# Altium PCB Leningrad_orig.PcbDoc (part 3 of 3)
Units mil, origin at the board's own origin, x right, y up, seen from the top; angles counter-clockwise.
Board outline 8070.87 x 4724.41 mil, 2 copper layers (Top Layer, Bottom Layer); 124 components, 165 nets, 1259 pads, 367 vias.
Unrouted connection lines stored in the file: 15.
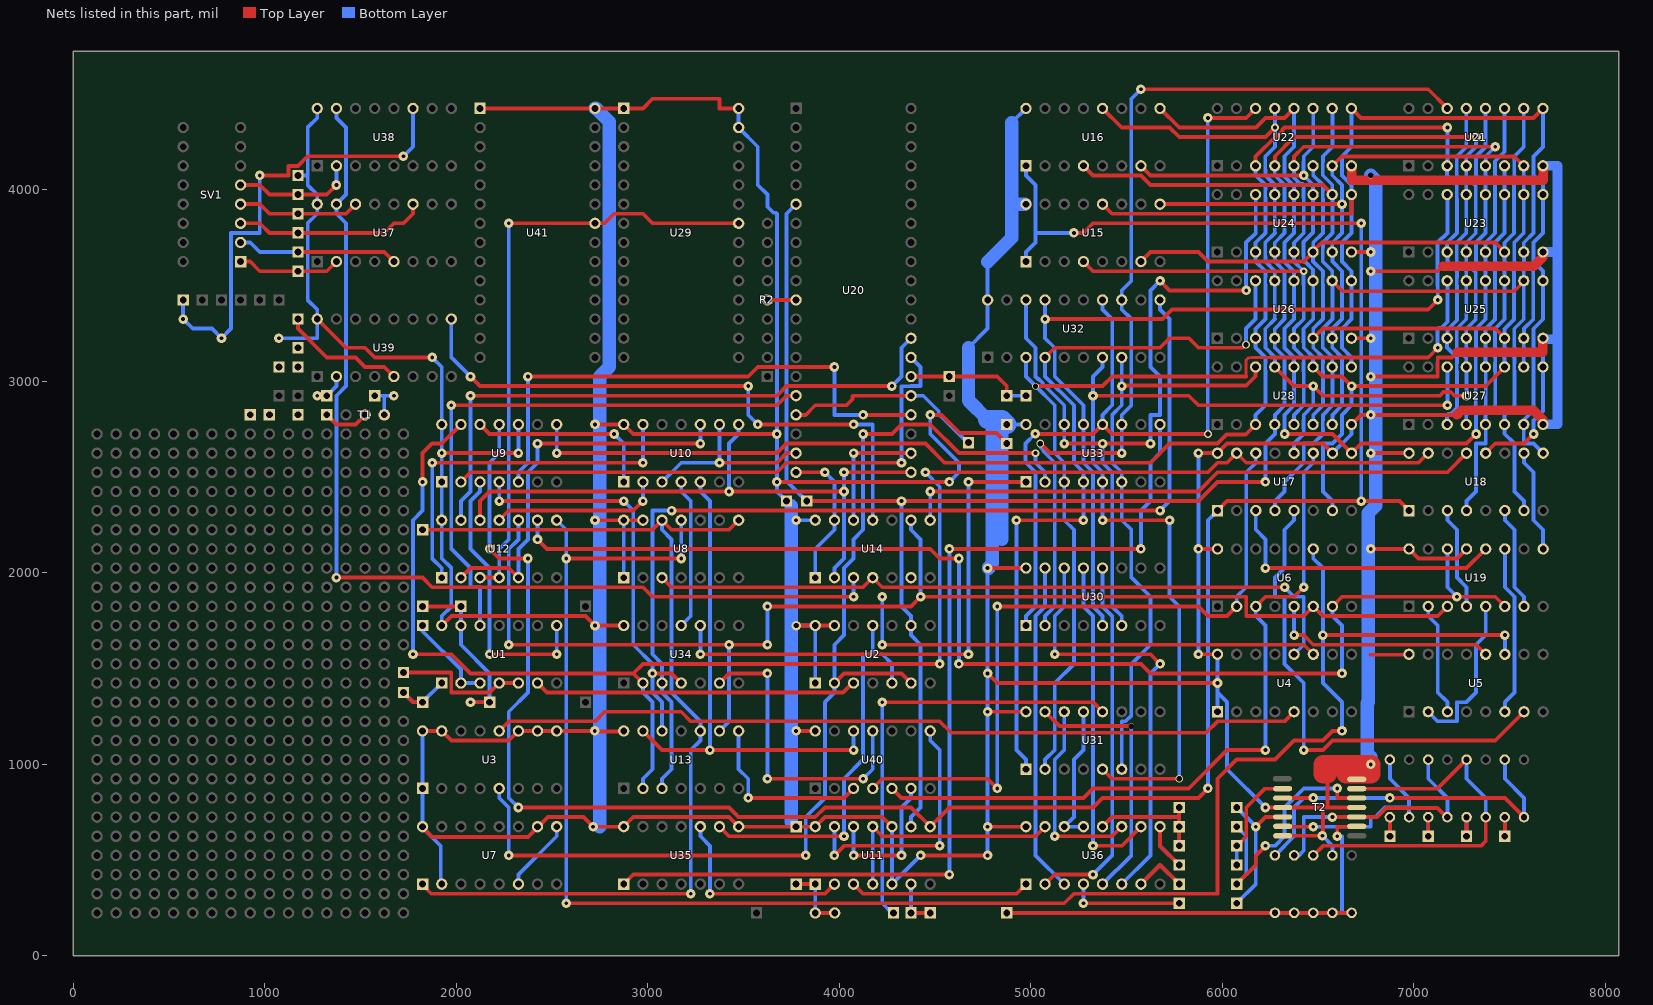
[diagram p2: the nets of this part, all layers, seen from the top]

## Via types
v1: diameter 50, hole 20, Top Layer to Bottom Layer, 354 vias
v2: diameter 40, hole 28, Top Layer to Bottom Layer, 6 vias
v3: diameter 40, hole 20, Top Layer to Bottom Layer, 3 vias
v4: diameter 30, hole 28, Top Layer to Bottom Layer, 2 vias
v5: diameter 50, hole 28, Top Layer to Bottom Layer, 1 vias
v6: diameter 35, hole 28, Top Layer to Bottom Layer, 1 vias

## Nets (pads, with @x,y where several pads share a name; then routed paths per layer and width w, separated by ;. In a path a pad name is that pad's centre, name@x,y a point inside that pad or via, vN(x,y) a via of type N, cw(c..) or ccw(c..) an arc to the next point about the centre after c; other vN are vias at no path point) (continued)
H\1\: U9.13 U13.2 U17.15 U18.15 U34.2 | length 8546
  Top Layer w20: v1(1775,1575) 1975,1575 2075,1475 2925,1475 ; v1(1825,2475) 1825,2625 1875,2675 1925,2675 U9.13@2025,2775 ; U34.2@2975,1425 2925,1475 ; v1(4450,2525) 5925,2525 5975,2575 6025,2575 U17.15@6075,2625 6125,2575 7025,2575 U18.15@7075,2625 ; v1(4525,1525) 2975,1525 2925,1475
  Bottom Layer w20: v1(1775,1575) 1775,2275 1825,2325 v1(1825,2475) ; U13.2@2975,875 2975,925 3025,975 3025,1325 2975,1375 U34.2@2975,1425 ; v1(4450,2525) 4525,2450 v1(4525,1525)
I\N\T\: U1.12 U20.16 | length 3062.1
  Top Layer w20: v1(1975,2875) 3675,2875 3725,2925 U20.16@3775,2925
  Bottom Layer w20: v1(1975,2875) 1975,2125 2075,2025 2075,1925 2125,1925 U1.12@2125,1725
I\O\R\D\: U14.3 U37.15 U38.15 | length 5374.3
  Top Layer w20: v1(1375,1975) 1825,1975 1875,1925 2975,1925 3025,1875 v1(4075,1875)
  Bottom Layer w20: v1(1375,1975) 1375,2925 1425,2975 1425,3825 1375,3875 U37.15@1375,3925 1425,3975 1425,4325 1375,4375 U38.15@1375,4425 ; v1(4075,1875) U14.3@4075,1975
I\O\R\Q\: U14.1 U14.13 U20.20 | length 762.1
  Top Layer w20: U20.20@3775,2525 v1(3925,2525)
  Bottom Layer w20: U14.1@3875,1975 3875,2125 3975,2225 U14.13@3975,2275 3975,2475 v1(3925,2525)
I\O\W\R\: U14.11 U39.9 | length 3132.8
  Top Layer w20: v1(2075,3025) 2125,2975 v1(3525,2975) ; v1(3575,2775) v1(4075,2775)
  Bottom Layer w20: U39.9@1975,3325 1975,3125 v1(2075,3025) ; v1(3525,2975) 3525,2825 v1(3575,2775) ; v1(4075,2775) 4175,2775 U14.11@4175,2275
INFV: U11.2 U35.10 | length 1041.4
  Top Layer w20: v1(3325,325) 3925,325 U11.2@3975,375
  Bottom Layer w20: U35.10@3275,675 3275,625 3325,575 v1(3325,325)
KL0: R23.1 SV1.1 U37.2 | length 541.4
  Top Layer w20: SV1.1@875,3625 925,3625 975,3575 R23.1@1175,3575 1325,3575 U37.2@1375,3625
KL1: RKL1.1 SV1.2 U37.5 | length 841.4
  Top Layer w20: RKL1.1@1175,3675 1625,3675 U37.5@1675,3625
  Bottom Layer w20: SV1.2@875,3725 925,3725 975,3675 RKL1.1@1175,3675
KL2: RKL2.1 SV1.3 U37.11 | length 1012.1
  Top Layer w20: SV1.3@875,3825 975,3825 1025,3775 RKL2.1@1175,3775 1625,3775 1675,3825 1725,3825 1775,3875 U37.11@1775,3925
KL3: RKL3.1 SV1.4 U37.14 | length 641.4
  Top Layer w20: SV1.4@875,3925 975,3925 1025,3875 RKL3.1@1175,3875 1425,3875 U37.14@1475,3925
KL4: RKL4.1 SV1.5 U38.2 | length 641.4
  Top Layer w20: SV1.5@875,4025 975,4025 1025,3975 RKL4.1@1175,3975 1325,3975 v1(1375,4025)
  Bottom Layer w20: v1(1375,4025) U38.2@1375,4125
M\1\: U9.2 U20.27 | length 3011
  Top Layer w20: U9.2@2025,2475 2075,2525 3675,2525 3725,2575 v1(4325,2575)
  Bottom Layer w20: v1(4325,2575) 4325,2925 4325.47,2925.47 4325.47,2974.53 4374.53,2974.53 4375.47,2975.47 4424.53,2975.47 4424.53,3024.53 4425,3025 4425,3075 U20.27@4375,3125
M\R\E\Q\: U10.3 U10.9 U20.19 | length 962.1
  Top Layer w20: v1(3375,2575) 3675,2575 3725,2625 U20.19@3775,2625
  Bottom Layer w20: U10.3@3075,2475 3175,2575 v1(3375,2575) U10.9@3375,2775
MA0: U15.4 U18.4 U21.5 U22.5 U23.5 U24.5 U25.5 U26.5 U27.5 U28.5 | length 5896.4
  Top Layer w20: U15.4@5275,3625 5325,3575 v3(6425,3575) ; U22.5@6373.81,4125 6373.81,4173.81 6425,4225 v1(7425,4225)
  Bottom Layer w20: U28.5@6373.81,2775 6375,2776.19 6375,2825 6425,2875 6425,3053.05 6424.28,3053.77 6424.28,3095.52 6425,3096.23 6425,3125 6375,3175 6375,3223.81 U26.5@6373.81,3225 6375,3226.19 6375,3275 6425,3325 6425,3503.05 6424.28,3503.77 6424.28,3574.28 v3(6425,3575) 6373.81,3626.19 U24.5@6373.81,3675 6373.81,3723.81 6425,3775 6425,3958.77 6424.28,3959.49 6424.28,4001.23 6425,4001.95 6425,4025 6420,4030 6406.36,4030 6373.81,4062.55 U22.5@6373.81,4125 ; U18.4@7275,2325 7275,2375 7325,2425 7325,2675 7375,2675 7375,2773.81 U27.5@7373.81,2775 7373.81,2823.81 7425,2875 7425,3053.77 7424.28,3054.49 7424.28,3096.23 7425,3096.95 7425,3125 7373.81,3176.19 U25.5@7373.81,3225 7373.81,3273.81 7423.34,3323.34 7423.34,3576.66 7373.81,3626.19 U23.5@7373.81,3675 7373.81,3723.81 7423.34,3773.34 7423.34,4026.66 7373.81,4076.19 U21.5@7373.81,4125 7375,4126.19 7375,4175 v1(7425,4225)
MA1: U15.7 U18.7 U21.6 U22.6 U23.6 U24.6 U25.6 U26.6 U27.6 U28.6 | length 6499.8
  Top Layer w20: U15.7@5575,3625 5625,3675 5875,3675 5925,3625 6425,3625 6473.81,3673.81 U24.6@6473.81,3675 6473.81,3680 6518.81,3725 7425,3725 7473.81,3676.19 U23.6@7473.81,3675 ; U26.6@6473.81,3225 6475,3225 6525,3275 7425,3275 7473.81,3226.19 U25.6@7473.81,3225 U25.6@7473.81,3220
  Bottom Layer w20: U28.6@6473.81,2775 6475,2776.19 6475,2825 6525,2875 6525,3053.05 6524.28,3053.77 6524.28,3095.52 6525,3096.23 6525,3125 6475,3175 6475,3223.81 U26.6@6473.81,3225 6475,3226.19 6475,3275 6525,3325 6525,3503.05 6524.28,3503.77 6524.28,3545.52 6525,3546.23 6525,3575 6473.81,3626.19 U24.6@6473.81,3675 6475,3676.19 6475,3725 6525,3775 6525,3953.05 6524.28,3953.77 6524.28,3995.52 6525,3996.23 6525,4025 6475,4075 6475,4123.81 U22.6@6473.81,4125 ; U21.6@7473.81,4125 7473.81,4076.19 7523.34,4026.66 7523.34,3773.34 7473.81,3723.81 U23.6@7473.81,3675 7473.81,3626.19 7523.34,3576.66 7523.34,3323.34 7473.81,3273.81 U25.6@7473.81,3225 7473.81,3176.19 7525,3125 7525,3096.95 7524.28,3096.23 7524.28,3054.49 7525,3053.77 7525,2875 7473.81,2823.81 U27.6@7473.81,2775 7473.81,2726.19 7525,2675 7525,2425 7575,2375 U18.7@7575,2325
MA2: U15.9 U18.9 U21.7 U22.7 U23.7 U24.7 U25.7 U26.7 U27.7 U28.7 | length 5137.5
  Top Layer w20: U15.9@5675,3925 v1(6625,3925) ; U22.7@6573.81,4125 6623.34,4174.53 7524.28,4174.53 U21.7@7573.81,4125
  Bottom Layer w20: U28.7@6573.81,2775 6575,2776.19 6575,2825 6625,2875 6625,3053.05 6624.28,3053.77 6624.28,3095.52 6625,3096.23 6625,3125 6573.81,3176.19 U26.7@6573.81,3225 6575,3226.19 6575,3275 6625,3325 6625,3503.05 6624.28,3503.77 6624.28,3545.52 6625,3546.23 6625,3575 6575,3625 6575,3673.81 U24.7@6573.81,3675 6573.81,3723.81 6625,3775 v1(6625,3925) 6624.28,3925.72 6624.28,3996.23 6625,3996.95 6625,4025 6573.81,4076.19 U22.7@6573.81,4125 ; U25.7@7573.81,3220 7573.81,3176.19 7624.28,3125.72 7624.28,3054.49 7625,3053.77 7625,2850 7573.81,2798.81 U27.7@7573.81,2775 7573.81,2676.19 7575,2675 7625,2675 U18.9@7675,2625 ; U21.7@7573.81,4125 7573.81,4076.19 7625,4025 7625,3996.23 7624.28,3995.52 7624.28,3953.77 7625,3953.05 7625,3775 7573.81,3723.81 U23.7@7573.81,3675 7575.6,3673.21 7575.6,3624.4 7623.34,3576.66 7623.34,3323.34 7575.6,3275.6 U25.7@7575.6,3249.4
MA3: U15.12 U18.12 U21.9 U22.9 U23.9 U24.9 U25.9 U26.9 U27.9 U28.9 | length 6077
  Top Layer w20: U15.12@5375,3925 5425,3875 6675,3875 6673.81,3876.19 U24.9@6673.81,3975 ; U22.9@6673.81,4425 6723.81,4375 7623.81,4375 U21.9@7673.81,4425 ; U18.12@7375,2625 7425,2675 7575,2675 v1(7625,2725)
  Bottom Layer w20: U28.9@6673.81,3075 6673.81,3123.81 6675,3125 6625,3175 6625,3203.05 6624.28,3203.77 6624.28,3274.28 6675,3325 6675,3523.81 U26.9@6673.81,3525 6675,3526.19 6675,3575 6625,3625 6625,3653.05 6624.28,3653.77 6624.28,3724.28 6675,3775 6675,3973.81 U24.9@6673.81,3975 6675,3976.19 6675,4025 6625,4075 6625,4103.05 6624.28,4103.77 6624.28,4174.28 6675,4225 6675,4423.81 U22.9@6673.81,4425 ; v1(7625,2725) 7625,2738.67 7624.28,2739.38 7624.28,2795.52 7673.81,2845.04 U27.9@7673.81,3075 7673.81,3126.19 7624.28,3175.72 7624.28,3274.28 7673.81,3323.81 U25.9@7673.81,3525 7673.81,3576.19 7624.28,3625.72 7624.28,3724.28 7673.81,3773.81 U23.9@7673.81,3975 7673.81,4026.19 7624.28,4075.72 7624.28,4174.28 7673.81,4223.81 U21.9@7673.81,4425
MA4: U16.4 U17.4 U21.10 U22.10 U23.10 U24.10 U25.10 U26.10 U27.10 U28.10 | length 6258.5
  Top Layer w20: U16.4@5275,4125 5325,4075 5575,4075 5625,4025 6525,4025 6573.81,3976.19 U24.10@6573.81,3975 ; U26.10@6573.81,3525 6628.34,3470.47 7524.28,3470.47 U25.10@7573.81,3520
  Bottom Layer w20: U17.4@6275,2325 6275,2375 6325,2425 6325,2475 6425,2575 6425,2675 6475,2675 6525,2725 6525,2753.77 6524.28,2754.49 6524.28,2796.23 6525,2796.95 6525,2825 6575,2875 6575,3073.81 U28.10@6573.81,3075 6573.81,3126.19 6524.28,3175.72 6524.28,3246.23 6525,3246.95 6525,3275 6575,3325 6575,3523.81 U26.10@6573.81,3525 6573.81,3576.19 6524.28,3625.72 6524.28,3696.23 6525,3696.95 6525,3725 6575,3775 6575,3973.81 U24.10@6573.81,3975 6573.81,4026.19 6524.28,4075.72 6524.28,4146.23 6525,4146.95 6525,4175 6575,4225 6575,4423.81 U22.10@6573.81,4425 ; U27.10@7573.81,3075 7573.81,3126.19 7524.28,3175.72 7524.28,3274.28 7573.81,3323.81 U25.10@7573.81,3525 7573.81,3576.19 7524.28,3625.72 7524.28,3724.28 7573.81,3773.81 U23.10@7573.81,3975 7573.81,4026.19 7524.28,4075.72 7524.28,4174.28 7573.81,4223.81 U21.10@7573.81,4425
MA5: U16.7 U17.7 U21.11 U22.11 U23.11 U24.11 U25.11 U26.11 U27.11 U28.11 | length 5670
  Top Layer w20: U16.7@5575,4125 5625,4075 v1(6425,4075) ; U28.11@6473.81,3075 6475,3075 6525,3025 6625,3025 v1(6675,2975) 7375,2975 7473.81,3073.81 U27.11@7473.81,3075
  Bottom Layer w20: U28.11@6473.81,3075 6473.81,3126.19 6425,3175 6425,3203.05 6424.28,3203.77 6424.28,3274.28 6475,3325 6475,3523.81 U26.11@6473.81,3525 6473.81,3582.76 6431.57,3625 6425,3625 6425,3653.05 6424.28,3653.77 6424.28,3726.66 6473.81,3776.19 U24.11@6473.81,3975 6473.81,4023.81 6475,4025 v1(6425,4075) 6424.28,4075.72 6424.28,4146.23 6425,4146.95 6425,4175 6475,4225 6475,4423.81 U22.11@6473.81,4425 ; U17.7@6575,2325 6575,2375 6525,2425 6525,2675 6575,2675 6625,2725 6625,2753.77 6624.28,2754.49 6624.28,2796.23 6625,2796.95 6625,2825 6675,2875 v1(6675,2975) ; U27.11@7473.81,3075 7473.81,3126.19 7424.28,3175.72 7424.28,3274.28 7473.81,3323.81 U25.11@7473.81,3525 7473.81,3576.19 7424.28,3625.72 7424.28,3724.28 7473.81,3773.81 U23.11@7473.81,3975 7473.81,4026.19 7424.28,4075.72 7424.28,4149.28 7473.81,4198.81 U21.11@7473.81,4425
MA6: U16.9 U17.9 U21.12 U22.12 U23.12 U24.12 U25.12 U26.12 U27.12 U28.12 | length 5557.9
  Top Layer w20: U16.9@5675,4425 5775,4325 6175,4325 6225,4375 6325,4375 6373.81,4423.81 U22.12@6373.81,4425 ; v1(6325,2725) 6575,2725 U17.9@6675,2625 6725,2675 7275,2675 v1(7325,2725)
  Bottom Layer w20: v1(6325,2725) 6324.28,2725.72 6324.28,2796.23 6325,2796.95 6325,2825 6375,2875 6375,3073.81 U28.12@6373.81,3075 6373.81,3123.81 6324.28,3173.34 6324.28,3246.23 6325,3246.95 6325,3275 6375,3325 6375,3523.81 U26.12@6373.81,3525 6373.81,3573.81 6324.28,3623.34 6324.28,3696.23 6325,3696.95 6325,3725 6375,3775 6375,3973.81 U24.12@6373.81,3975 6373.81,4020.12 6324.28,4069.65 6324.28,4146.23 6325,4146.95 6325,4175 6375,4225 6375,4423.81 U22.12@6373.81,4425 ; v1(7325,2725) 7324.28,2725.72 7324.28,2796.23 7325,2796.95 7325,2825 7375,2875 7375,3073.81 U27.12@7373.81,3075 7373.81,3126.19 7324.28,3175.72 7324.28,3274.28 7373.81,3323.81 U25.12@7373.81,3525 7373.81,3576.19 7324.28,3625.72 7324.28,3724.28 7373.81,3773.81 U23.12@7373.81,3975 7373.81,4026.19 7324.28,4075.72 7324.28,4174.28 7373.81,4223.81 U21.12@7373.81,4425
MA7: U16.12 U17.12 U21.13 U22.13 U23.13 U24.13 U25.13 U26.13 U27.13 U28.13 | length 5556.4
  Top Layer w20: U16.12@5375,4425 5475,4325 5725,4325 5775,4275 6225,4275 v3(6275,4325) ; U28.13@6273.81,3075 6373.81,2975 v1(6475,2975) 6525,2925 7136.36,2925 7155.17,2943.81 7192.45,2943.81 7211.26,2925 v1(7275,2925)
  Bottom Layer w20: U28.13@6273.81,3075 6275,3076.19 6275,3125 6225,3175 6225,3203.05 6224.28,3203.77 6224.28,3274.28 6275,3325 6273.81,3326.19 U26.13@6273.81,3525 6273.81,3573.81 6275,3575 6225,3625 6225,3653.05 6224.28,3653.77 6224.28,3724.28 6275,3775 6273.81,3776.19 U24.13@6273.81,3975 6273.81,4023.81 6275,4025 6225,4075 6225,4103.05 6224.28,4103.77 6224.28,4174.28 6275,4225 v3(6275,4325) 6275,4423.81 U22.13@6273.81,4425 ; U17.12@6375,2625 6375,2675 6425,2725 6425,2753.77 6424.28,2754.49 6424.28,2796.23 6425,2796.95 6425,2825 6475,2875 v1(6475,2975) ; U21.13@7273.81,4425 7273.81,4223.81 7224.28,4174.28 7224.28,4075.47 7273.81,4025.95 U23.13@7273.81,3975 7273.81,3773.81 7224.28,3724.28 7224.28,3625.47 7273.81,3575.95 U25.13@7273.81,3525 7273.81,3323.81 7224.28,3274.28 7224.28,3170.47 7273.81,3120.95 U27.13@7273.81,3075 7275,3073.81 v1(7275,2925)
MD0: U21.14 U30.2 U32.13 U33.11 | length 5071.3
  Top Layer w20: v2(5050,2675) 5100,2625 v1(5475,2625) ; v1(5575,4525) 7075,4525 7173.81,4426.19 U21.14@7173.81,4425
  Bottom Layer w20: v2(5050,2675) 5050,2656.57 5065,2641.57 5065,2635 5125,2575 5125,1825 5075,1775 U30.2@5075,1725 ; v1(5475,2625) U33.11@5475,2775 5475,2825 5525,2875 5525,3325 5475,3375 U32.13@5475,3425 5475,3475 5525,3525 5525,4475 v1(5575,4525)
MD1: U22.14 U30.1 U32.14 U33.12 | length 4620.9
  Top Layer w20: v1(5023.61,2726.39) 5024.53,2725.47 5324.53,2725.47 5325,2725 U33.12@5375,2775 5425,2725 v2(5925,2725) ; v1(5925,4375) 6125,4375 6173.81,4423.81 U22.14@6173.81,4425
  Bottom Layer w20: U30.1@4975,1725 4975,1775 5025,1825 5025,2525 4972.22,2577.78 4972.22,2675 v1(5023.61,2726.39) ; U33.12@5375,2775 5375,2825 5425,2875 5425,3325 5375,3375 U32.14@5375,3425 ; v2(5925,2725) 5925,2735.75 5924.28,2736.47 5924.28,4374.28 v1(5925,4375)
MD2: U23.14 U30.5 U32.17 U33.13 | length 4487.5
  Top Layer w20: v1(5075,3325) 5687.47,3325 5737.47,3375 7075,3375 v1(7125,3425)
  Bottom Layer w20: U32.17@5075,3425 v1(5075,3325) 5075,3225 5125,3175 5125,3025 5275,2875 U33.13@5275,2775 5275,2575 5325,2525 5325,1825 5375,1775 U30.5@5375,1725 ; v1(7125,3425) 7125,3498.05 7124.28,3498.77 7124.28,3724.28 7175,3775 7175,3973.81 U23.14@7173.81,3975
MD3: U24.14 U30.6 U32.18 U33.14 | length 4210
  Top Layer w20: v1(5175,2675) v1(5375,2675) v1(5625,2675) ; v1(5675,3525) 5725,3475 v1(6125,3475)
  Bottom Layer w20: U32.18@4975,3425 4975,3225 5025,3175 5025,3025 5037.5,3012.5 5040.53,3012.5 5062.5,2990.53 5062.5,2987.5 5175,2875 U33.14@5175,2775 v1(5175,2675) ; v1(5375,2675) 5375,2575 5425,2525 5425,1825 5475,1775 U30.6@5475,1725 ; v1(5625,2675) 5625,2825 5675,2825 5675,3025 5625,3075 5625,3475 v1(5675,3525) ; v1(6125,3475) 6125,3503.05 6124.28,3503.77 6124.28,3724.28 6175,3775 6175,3973.81 U24.14@6173.81,3975
MD4: U25.14 U31.2 U32.3 U33.3 | length 4931.1
  Top Layer w15: 6124.28,3025.72 6124.28,3110.39 6137.21,3123.32 6151.77,3123.32 6153.45,3125 6253.77,3125 6254.33,3124.44 6254.33,3122.03
  Top Layer w20: v6(5025,2975) 5375,2975 5425.47,3025.47 6124.04,3025.47 6124.28,3025.72 ; 6253.77,3125 7075,3125 v1(7125,3175)
  Bottom Layer w20: U32.3@4975,3125 4975,3025 v6(5025,2975) 5125,2875 5125,2625 5175,2575 U33.3@5175,2475 5175,2275 5225,2225 5225,1525 5125,1425 5125,1075 5075,1025 U31.2@5075,975 ; v1(7125,3175) 7125,3203.05 7124.28,3203.77 7124.28,3274.28 7130,3280 7143.64,3280 7175,3311.36 7175,3523.81 U25.14@7173.81,3525
MD5: U26.14 U31.1 U32.4 U33.4 | length 4076.1
  Top Layer w20: v1(4925,2275) v1(5275,2275) ; U32.4@5075,3125 5125,3175 5675,3175 5725,3225 5825.95,3225 5875.47,3175.47 6108.05,3175.47 6123.39,3190.82 v2(6123.81,3190.82)
  Bottom Layer w20: v1(4925,2275) 4925,1075 4975,1025 U31.1@4975,975 ; U32.4@5075,3125 5075,3025 5225,2875 5225,2575 5275,2525 U33.4@5275,2475 v1(5275,2275) ; v2(6123.81,3190.82) 6123.81,3201.86 6125,3203.05 6124.28,3203.77 6124.28,3276.66 6173.81,3326.19 U26.14@6173.81,3525
MD6: U27.14 U31.5 U32.7 U33.5 | length 5104
  Top Layer w20: v1(5325,2925) 5825,2925 5875,2875 v1(7175,2875) ; U31.5@5375,975 5425,925 v2(5775,925) ; v1(5375,2275) v1(5725,2275)
  Bottom Layer w20: v1(5375,2275) U33.5@5375,2475 5375,2525 5325,2575 v1(5325,2925) 5325,3025 5375,3075 U32.7@5375,3125 ; v1(5725,2275) 5725,1875 5775,1825 v2(5775,925) ; U27.14@7173.81,3075 7175,3073.81 v1(7175,2875)
MD7: U28.14 U31.6 U32.8 U33.6 | length 3096.3
  Top Layer w20: v1(5475,2975) 5477.38,2977.38 6125,2977.38 6173.81,3026.19 U28.14@6173.81,3075
  Bottom Layer w20: U31.6@5475,975 5475,1225 5475.47,1225.47 5495.51,1225.47 5525,1254.96 5525,1525 5625,1625 5625,1875 5525,1975 5525,2225 5475,2275 U33.6@5475,2475 5475,2525 5425,2575 5425,2825 5475,2875 v1(5475,2975) U32.8@5475,3125
NetB_1: B.1 R10.2 | length 200
  Top Layer w20: B.1@7075,625 R10.2@7075,725
  Bottom Layer w20: B.1@7075,625 R10.2@7075,725
NetC1_1_1: +C1.1 R5.1 RST.1 U20.26 | length 670.7
  Top Layer w20: U20.26@4375,3025 +C1.1@4575,3025 4825,3025 4875,2975 R5.1@4875,2925
  Bottom Layer w20: R5.1@4875,2925 RST.1@4975,2925
NetC2_1_1: C2_1.1 U7.1 U8.8 U8.12 U13.10 | length 5184.3
  Top Layer w20: U7.1@1825,370 1870,325 v1(3225,325) ; C2_1.1@1825,2225 3025,2225 U8.12@3075,2275 3125,2225 3425,2225 U8.8@3475,2275
  Bottom Layer w20: U8.12@3075,2275 3075,2225 3125,2175 3125,1375 3275,1225 U13.10@3275,1175 3275,1125 3225,1075 v1(3225,325)
NetC2_2_1: C2.1 D1.1 R3.1 U1.13 | length 962.1
  Top Layer w20: C2.1@1825,1825 R3.1@2025,1825 ; v1(2075,1325) D1.1@2175,1325
  Bottom Layer w20: R3.1@2025,1825 U1.13@2025,1725 2025,1625 2175,1475 D1.1@2175,1325 v1(2075,1325)
NetC5_2_1: C5.1 C6.1 R31_2.1 R32.1
NetC6_2_1: C6_2.1 WR.1
NetD2_1: D2.1 D3.1 R4.1 U11.1 | length 452.9
  Top Layer w20: R4.1@3775,375 U11.1@3875,375 ; D2.1@3875,225 D3.1@3976.46,225
  Bottom Layer w20: U11.1@3875,375 D2.1@3875,225 D3.1@3976.46,225
NetD3_2: D3.2 U31.12 | length 2300
  Top Layer w20: v1(4225,1325) 5325,1325 U31.12@5375,1275
  Bottom Layer w20: v1(4225,1325) 4225,275 4275,225 D3.2@4283.54,225
NetD4_2_1: D4_2.1 R14.1 R15.2 R16.2 R17.2 R18.2 T2.2 | length 2777.3
  Top Layer w20: D4_2.1@4875,225 R17.2@6275,225 R18.2@6375,225 R16.2@6475,225 R14.1@6575,225 R15.2@6675,225 ; v1(6600,625) 6600,675 6700.12,675 T2.2@6701.69,676.57
  Bottom Layer w20: R17.2@6275,225 R18.2@6375,225 R16.2@6475,225 R14.1@6575,225 6625,225 ; v1(6600,625) 6625,625 6625,225 ; R15.2@6675,225 6625,225
NetG_1: G.1 R12.2 | length 200
  Top Layer w20: G.1@7275,625 R12.2@7275,725
  Bottom Layer w20: G.1@7275,625 R12.2@7275,725
NetR1_1_1: R1.1 U1.1 Y1.1 | length 382.8
  Top Layer w20: Y1.1@1725,1375 1775,1325 R1.1@1825,1325
  Bottom Layer w20: Y1.1@1725,1375 1775,1325 R1.1@1825,1325 U1.1@1925,1425
NetR1_2_1: R1_2.1 U1.2 U1.3 | length 482.8
  Bottom Layer w20: R1_2.1@1825,1725 1825,1695 2025,1495 U1.2@2025,1425 U1.3@2125,1425
NetR6_1_1: R6.1 U20.17 U20.25 | length 1058.9
  Top Layer w20: U20.17@3775,2825 3825,2825 3875,2875 4038.64,2875 4070,2906.36 4070,2920 4075,2925 U20.25@4375,2925
  Bottom Layer w20: U20.25@4375,2925 4438.64,2925 4520,2843.64 4520,2830 4670,2680 R6.1@4675,2680
NetR7_1_1: R7.1 U36.4 | length 600
  Top Layer w20: v1(5275,275) R7.1@5775,275
  Bottom Layer w20: v1(5275,275) U36.4@5275,375
NetR7_2_1: R7_2.1 RD1_2.1 T2.12 | length 743.9
  Top Layer w20: v1(6175,675) 6225.79,725.79 T2.12@6315,725.79
  Bottom Layer w20: R7_2.1@6075,275 6175,375 v1(6175,675) RD1_2.1@6075,775
NetR8_1_1: R8.1 U36.7 | length 565.7
  Top Layer w20: U36.7@5575,375 5675,475 R8.1@5775,375
  Bottom Layer w20: U36.7@5575,375 5675,475 R8.1@5775,375
NetR8_2_1: R8_2.1 RD2_2.1 T2.5 | length 1342.7
  Top Layer w20: R8_2.1@6075,375 6175,475 6175,525 v1(6225,575) ; v1(6600,875) 6600,825 6700.91,825 T2.5@6701.69,824.21
  Bottom Layer w20: R8_2.1@6075,375 6125,425 6125,625 RD2_2.1@6075,675 ; v1(6225,575) 6275,575 6325,625 6325,775 6425,875 v1(6600,875)
NetR9_1_1: R9.1 U36.9 | length 482.8
  Top Layer w20: U36.9@5675,675 5675,575 R9.1@5775,475
  Bottom Layer w20: U36.9@5675,675 5675,575 R9.1@5775,475
NetR9_2_1: R9_2.1 RD3_2.1 T2.9 | length 551.5
  Top Layer w20: RD3_2.1@6075,575 6125,625 6125,775 6223.42,873.42 T2.9@6315,873.42
  Bottom Layer w20: R9_2.1@6075,475 RD3_2.1@6075,575
NetR10_1: R10.1 R18.1 R20.2 T2.3 | length 1366.2
  Top Layer w20: v1(6575,725) 6575.79,725.79 T2.3@6701.69,725.79 6808.53,725.79 6855.3,772.56 7122.56,772.56 7170.12,725 R20.2@7175,725
  Bottom Layer w20: R18.1@6375,525 6400,525 6425,550 6425,725 v1(6575,725) ; R10.1@7075,1025 7075,925 7175,825 R20.2@7175,725
NetR11_1: R11.1 R17.1 R21.2 T2.10 | length 2056
  Top Layer w20: T2.10@6315,824.21 6315.79,825 v1(6475,825) ; v1(6875,825) 7475,825 R21.2@7575,725
  Bottom Layer w20: R17.1@6275,525 6375,625 6375,775 6425,825 v1(6475,825) 6873.43,825 6874.21,824.21 v1(6875,825) ; R11.1@7475,1025 7475,925 7575,825 R21.2@7575,725
NetR11_2: R11.2 R.1 | length 200
  Top Layer w20: R.1@7475,625 R11.2@7475,725
  Bottom Layer w20: R.1@7475,625 R11.2@7475,725
NetR12_1: R12.1 R16.1 R22.2 T2.6 | length 2033.6
  Top Layer w20: R16.1@6475,525 6525,575 7350,575 7375,600 R22.2@7375,725 ; T2.6@6701.69,873.42 7123.42,873.42 R12.1@7275,1025
  Bottom Layer w20: R12.1@7275,1025 7275,925 7375,825 R22.2@7375,725
NetR13_1: R13.1 R19.2 T2.13 | length 1072.8
  Top Layer w20: T2.13@6315,676.57 6316.58,675 v1(6475,675)
  Bottom Layer w20: v1(6475,675) 6775,675 6775,725 6800,725 6850,775 6975,775 ; R13.1@6875,1025 6875,925 6975,825 6975,775 ; R19.2@6975,725 6975,775
NetR13_2: R13.2 V.1 | length 200
  Top Layer w20: V.1@6875,625 R13.2@6875,725
  Bottom Layer w20: V.1@6875,625 R13.2@6875,725
NetR24_1_1: R24.1 U39.2 | length 170.7
  Bottom Layer w20: v1(1275,2925) R24.1@1325,2925 1375,2975 U39.2@1375,3025
NetR24_2_1: R24_2.1 T1.3 | length 200
  Bottom Layer w20: R24_2.1@1575,2925 1625,2925 ; T1.3@1625,2825 1625,2925 ; v1(1675,2925) 1625,2925
NetR31_1_1: R31.1 U39.5 | length 653.6
  Top Layer w20: R31.1@1175,3325 1175,3275 1325,3125 1475,3125 1525,3075 1625,3075 U39.5@1675,3025
NetRD1_1_1: R_D1.1 R_D2.1 R_D3.1 U36.12 | length 820.7
  Top Layer w20: U36.12@5375,675 5425,725 5775,725 ; R_D3.1@5775,575 R_D2.1@5775,675 5775,725 ; R_D1.1@5775,775 5775,725
  Bottom Layer w20: R_D3.1@5775,575 R_D2.1@5775,675 R_D1.1@5775,775
NetSND_1: SND.1 T1.2 | length 241.4
  Top Layer w20: SND.1@1325,2825 1375,2775 1475,2775 T1.2@1525,2825
NetU1_4: U1.4 U1.5 Y1_2.1 | length 725.7
  Top Layer w20: Y1_2.1@1725,1480 1975,1480 1975,1375 2175,1375 U1.4@2225,1425 U1.5@2325,1425
NetU1_6: U1.6 U2.3 | length 1690
  Top Layer w20: U1.6@2425,1425 2475,1375 4020,1375 U2.3@4072.5,1427.5
NetU1_8: U1.8 U9.3 | length 1462.1
  Top Layer w20: v1(2175,1575) v1(2525,1575)
  Bottom Layer w20: U9.3@2125,2475 2125,2425 2075,2375 2075,2125 2175,2025 v1(2175,1575) ; v1(2525,1575) U1.8@2525,1725
NetU3_12: U3.12 U4.5 | length 4282.5
  Top Layer w20: U3.12@2225,1175 2275,1225 2725,1225 2775,1275 3175,1275 3225,1225 4525,1225 4585,1165 5915,1165 5975,1225 6325,1225 U4.5@6375,1275
NetU4_11: U4.11 U14.6 | length 2520.7
  Top Layer w20: v1(4225,1625) 6425,1625 U4.11@6475,1575
  Bottom Layer w20: v1(4225,1625) v1(4225,1875)
NetU4_12: U4.12 U8.3 U14.4 | length 3753.6
  Top Layer w20: U8.3@3075,1975 3125,1925 4125,1925 U14.4@4175,1975 4225,1925 v1(6325,1925)
  Bottom Layer w20: v1(6325,1925) 6375,1875 6425,1875 6425,1625 U4.12@6375,1575
NetU5_11: U5.11 U6.11 U8.11 U12.8 | length 9657.1
  Top Layer w20: v1(2575,275) 5175,275 5225,325 5975,325 5975,925 6075,1025 6275,1025 6375,1125 6525,1125 6575,1175 v1(6625,1175) ; v1(2575,2075) v1(3175,2075) ; v1(6525,1675) v1(7475,1675)
  Bottom Layer w20: U12.8@2525,2275 2575,2225 v1(2575,2075) v1(2575,275) ; v1(3175,2075) U8.11@3175,2275 ; U6.11@6475,2125 6475,2075 6525,2025 v1(6525,1675) 6525,1425 6625,1325 v1(6625,1175) ; U5.11@7475,1575 v1(7475,1675)
NetU5_12: U5.12 U6.5 | length 1191.4
  Top Layer w20: v1(6375,1675) 6425,1675 6475,1625 7325,1625 U5.12@7375,1575
  Bottom Layer w20: v1(6375,1675) U6.5@6375,1825
NetU7_6: U7.6 U7.9 | length 382.8
  Bottom Layer w20: U7.6@2325,370 U7.6@2325,375 2325,425 2525,625 U7.9@2525,670
NetU9_12: U9.12 U10.1 | length 991.4
  Top Layer w20: U9.12@2125,2775 2175,2725 v1(2825,2725)
  Bottom Layer w20: v1(2825,2725) 2875,2675 U10.1@2875,2475
NetU10_2: U10.2 U12.11 | length 891.4
  Top Layer w20: U12.11@2225,2275 2275,2325 2925,2325 v1(2975,2375)
  Bottom Layer w20: v1(2975,2375) U10.2@2975,2475
NetU10_4: U10.4 U34.11 | length 791.4
  Bottom Layer w20: U34.11@3175,1725 3225,1775 3225,2375 3175,2425 U10.4@3175,2475
NetU10_5: U10.5 U13.13 U40.12 | length 2662.1
  Top Layer w20: U13.13@2975,1175 3075,1075 v1(3325,1075) v1(4075,1075)
  Bottom Layer w20: U10.5@3275,2475 3275,2425 3325,2375 v1(3325,1075) ; v1(4075,1075) U40.12@4075,1175
NetU10_10: U10.10 U12.2 U12.5 | length 2032.8
  Top Layer w20: U12.2@2025,1975 2075,2025 2275,2025 U12.5@2325,1975 ; v1(2425,2675) v1(3275,2675)
  Bottom Layer w20: U12.5@2325,1975 2325,2125 2375,2175 2375,2525 2425,2575 v1(2425,2675) ; v1(3275,2675) U10.10@3275,2775
NetU10_13: U10.13 U12.1 | length 1920.7
  Top Layer w20: v1(1875,2575) v1(2975,2575)
  Bottom Layer w20: v1(1875,2575) 1875,2075 1925,2025 U12.1@1925,1975 ; v1(2975,2575) U10.13@2975,2775
NetU11_3: U11.3 U36.1 | length 941.4
  Top Layer w20: U11.3@4075,375 4125,325 4925,325 U36.1@4975,375
NetU11_12: U11.12 U40.6 | length 770.7
  Top Layer w20: v1(4075,525) v1(4325,525)
  Bottom Layer w20: v1(4075,525) U11.12@4075,675 ; v1(4325,525) 4325,775 4375,825 U40.6@4375,875
NetU11_13: U11.13 U40.8 | length 1341.4
  Top Layer w20: v1(3975,525) 4025,575 v1(4525,575)
  Bottom Layer w20: v1(3975,525) U11.13@3975,675 ; U40.8@4475,1175 4475,1125 4525,1075 v1(4525,575)
NetU13_8: U13.8 U40.3 | length 941.4
  Top Layer w20: v1(3525,825) 4025,825 U40.3@4075,875
  Bottom Layer w20: U13.8@3475,1175 3475,975 3525,925 v1(3525,825)
NetU14_8: U14.8 U18.13 | length 3032.8
  Top Layer w20: v1(4475,2425) 5875,2425 5975,2525 7175,2525 U18.13@7275,2625
  Bottom Layer w20: U14.8@4475,2275 v1(4475,2425)
NetU17_3: U17.3 U19.12 | length 1512.1
  Top Layer w20: v1(6225,2025) 7275,2025 U19.12@7375,2125
  Bottom Layer w20: U17.3@6175,2325 6175,2250 6175,2225 6225,2175 v1(6225,2025)
NetU18_3: U18.3 U19.4 | length 541.4
  Bottom Layer w20: U18.3@7175,2325 7175,2275 7225,2225 7225,1975 7275,1925 U19.4@7275,1825
NetU18_6: U18.6 U19.7 | length 541.4
  Bottom Layer w20: U18.6@7475,2325 7475,2275 7525,2225 7525,1925 7575,1875 U19.7@7575,1825
NetU18_10: U18.10 U19.9 | length 541.4
  Bottom Layer w20: U18.10@7575,2625 7575,2575 7625,2525 7625,2275 7675,2225 U19.9@7675,2125
NetU30_12: U30.12 U36.2 | length 1932.8
  Top Layer w20: U36.2@5075,375 5125,425 v1(5325,425)
  Bottom Layer w20: v1(5325,425) 5425,525 5425,1775 5375,1825 U30.12@5375,2025
NetU30_13: U30.13 U36.10 | length 1762.1
  Top Layer w20: v1(5325,575) 5475,575 U36.10@5575,675
  Bottom Layer w20: U30.13@5275,2025 5275,1825 5325,1775 v1(5325,575)
NetU30_14: U30.14 U36.6 | length 2274.3
  Top Layer w20: v1(5125,1575) 5625,1575 v1(5675,1525)
  Bottom Layer w20: v1(5125,1575) 5125,1775 5175,1825 U30.14@5175,2025 ; U36.6@5475,375 5625,525 5625,1475 v1(5675,1525)
NetU30_15: U30.15 U36.3 | length 1732.8
  Bottom Layer w20: U30.15@5075,2025 5075,1825 5025,1775 5025,525 U36.3@5175,375
NetU31_13: U31.13 U36.13 U36.14 | length 741.4
  Bottom Layer w20: U36.13@5275,675 U36.14@5175,675 5225,725 5225,1025 5275,1075 U31.13@5275,1275
NetU31_14: U31.14 U36.11 | length 1041.4
  Top Layer w20: v1(5125,625) 5425,625 U36.11@5475,675
  Bottom Layer w20: v1(5125,625) 5125,1025 5175,1075 U31.14@5175,1275
NetU31_15: U31.15 U36.5 | length 1368.2
  Top Layer w20: U31.15@5075,1275 5150,1200 v4(5525,1200)
  Bottom Layer w20: U36.5@5375,375 5525,525 v4(5525,1200)
NetU33_9: U33.9 U35.1 | length 5112.1
  Top Layer w20: U35.1@2875,375 2925,425 v1(4575,425) ; v1(4575,2125) v1(5575,2125)
  Bottom Layer w20: v1(4575,425) v1(4575,2125) ; v1(5575,2125) 5575,2325 5625,2375 5625,2575 5675,2625 U33.9@5675,2775
NetU34_6: U34.6 U40.11 | length 1591.4
  Top Layer w20: U34.6@3375,1425 3425,1475 v1(3625,1475) ; v1(3625,925) v1(4125,925)
  Bottom Layer w20: v1(3625,925) v1(3625,1475) ; v1(4125,925) 4175,975 U40.11@4175,1175
R\A\S\: R2_2.1 U2.9 U11.9 U20.6 U21.4 U22.4 U23.4 U24.4 U25.4 U26.4 U27.4 U28.4 | length 10398.6
  Top Layer w20: R2_2.1@3830,2375 v1(4325,2375) 5875,2375 5975,2475 v1(6225,2475) ; U22.4@6273.81,4125 6275,4126.19 6275,4175 6375,4275 v1(7325,4275)
  Bottom Layer w20: U20.6@3775,3925 3725,3875 3725,3825 3725.47,3824.53 3725.47,2479.53 R2_2.1@3830,2375 ; v1(4325,2375) 4325,1825 4375,1775 U2.9@4375,1725 4375,1675 4425,1625 4425,775 4375,725 U11.9@4375,675 ; v1(6225,2475) 6225,2675 6275,2725 6275,2773.81 U28.4@6273.81,2775 6275,2776.19 6275,2825 6325,2875 6325,3053.05 6324.28,3053.77 6324.28,3125.72 6273.81,3176.19 U26.4@6273.81,3225 6273.81,3273.81 6325,3325 6325,3503.05 6324.28,3503.77 6324.28,3545.52 6325,3546.23 6325,3575 6275,3625 6275,3673.81 U24.4@6273.81,3675 6273.81,3723.81 6325,3775 6325,3953.77 6324.28,3954.49 6324.28,3996.23 6325,3996.95 6325,4025 6273.81,4076.19 U22.4@6273.81,4125 ; U27.4@7273.81,2775 7273.81,2823.81 7323.34,2873.34 7323.34,3126.66 7273.81,3176.19 U25.4@7273.81,3225 7273.81,3273.81 7323.34,3323.34 7323.34,3568.84 7273.81,3618.37 U23.4@7273.81,3675 7273.81,3723.81 7323.34,3773.34 7323.34,4018.84 7273.81,4068.37 U21.4@7273.81,4125 7273.81,4173.81 7325,4225 v1(7325,4275)
R\D\: U10.8 U12.12 U14.2 U20.21 | length 3312.1
  Top Layer w20: U12.12@2125,2275 2125,2375 2175,2425 v1(3425,2425) v1(4025,2425) ; v1(4025,2525) U20.21@4375,2525
  Bottom Layer w20: v1(3425,2425) 3425,2675 3475,2725 U10.8@3475,2775 ; U14.2@3975,1975 3975,2025 4025,2075 v1(4025,2425) v1(4025,2525)
R\D\R\O\M\: U12.3 U12.4 U29.22 U41.22 | length 3212.1
  Top Layer w20: U12.3@2125,1975 U12.4@2225,1975 ; v1(2275,3825) U41.22@2725,3825 2775,3825 2825,3875 2975,3875 3025,3825 U29.22@3475,3825
  Bottom Layer w20: U12.4@2225,1975 2225,2125 2275,2175 v1(2275,3825)
R\F\S\H\: U12.13 U20.28 | length 3182.8
  Top Layer w20: v1(2075,2925) 3675,2925 3725,2975 v1(4275,2975)
  Bottom Layer w20: U12.13@2025,2275 2025,2375 2075,2425 v1(2075,2925) ; v1(4275,2975) 4325,3025 4325,3175 U20.28@4375,3225
RAS: U9.11 U11.8 U15.1 U16.1 U17.1 U18.1 | length 12243.5
  Top Layer w20: v1(2175,2125) 2225,2075 v1(2375,2075) ; v1(2325,775) 3425,775 3475,725 3875,725 3925,775 4375,775 U11.8@4475,675 4575,775 5325,775 5375,825 5875,825 v1(5925,875) ; v1(5225,3775) 5275,3775 5325,3825 v1(6725,3825) ; U17.1@5975,2325 6025,2375 v1(6725,2375) 6925,2375 U18.1@6975,2325
  Bottom Layer w20: v1(2175,2125) 2175,2575 2225,2625 U9.11@2225,2775 ; v1(2325,775) 2275,825 2275,1275 2375,1375 v1(2375,2075) ; U15.1@4975,3625 4975,3675 5025,3725 5025,3775 ; U16.1@4975,4125 4975,4075 5025,4025 5025,3775 ; v1(5225,3775) 5025,3775 ; v1(5925,875) 5925,2275 U17.1@5975,2325 ; v1(6725,2375) v1(6725,3825)
S\C\R\: U33.1 U34.10 | length 2750
  Top Layer w20: v1(3275,1575) v1(4675,1575) ; v1(4675,2475) U33.1@4975,2475
  Bottom Layer w20: v1(3275,1575) U34.10@3275,1725 ; v1(4675,1575) v1(4675,2475)
S\Y\N\C\: U11.4 U11.11 U36.15 | length 1241.4
  Top Layer w20: U11.11@4175,675 4225,625 5025,625 U36.15@5075,675
  Bottom Layer w20: U11.4@4175,375 U11.11@4175,675
SYNC: D4.1 SYNC.1 U11.6 | length 250
  Top Layer w20: SYNC.1@4375,225 D4.1@4475,225
  Bottom Layer w20: SYNC.1@4375,225 U11.6@4375,375
T\I\: U2.2 U2.6 U3.5 U33.2 | length 5839.9
  Top Layer w20: v1(2275,525) v1(3825,525) ; U2.2@3975,1425 4025,1475 4325,1475 U2.6@4375,1425 ; v1(4125,2725) 4275,2725 4325,2775 4475,2775 4625,2625 v3(5025,2625)
  Bottom Layer w20: U3.5@2225,875 2225,825 2275,775 v1(2275,525) ; v1(3825,525) 3825,725 3925,825 3925,1325 3975,1375 U2.2@3975,1425 3975,1625 4025,1675 4025,2025 4075,2075 4075,2175 4125,2225 v1(4125,2725) ; v3(5025,2625) 5025,2575 5075,2525 U33.2@5075,2475
T_IN: RT_IN.1 U38.11 | length 2453.6
  Top Layer w20: v1(975,4075) 1125,4075 1125,4125 1175,4125 1225,4175 v1(1725,4175)
  Bottom Layer w20: RT_IN.1@575,3425 v1(575,3325) 625,3275 725,3275 v1(775,3225) 825,3275 825,3775 975,3775 v1(975,4075) ; v1(1725,4175) 1775,4225 U38.11@1775,4425
TI: U2.5 U2.11 U35.9 | length 2082.8
  Top Layer w20: U35.9@3375,675 3425,625 v1(4025,625)
  Bottom Layer w20: v1(4025,625) 4025,925 4125,1025 4125,1575 4175,1575 ; U2.11@4175,1725 4175,1575 ; U2.5@4275,1425 4275,1525 4225,1575 4175,1575
V0: U5.3 U19.2 | length 591.4
  Bottom Layer w20: U19.2@7075,1825 7075,1775 7125,1725 7125,1375 7175,1325 U5.3@7175,1275
V1: U5.2 U19.5 | length 862.1
  Bottom Layer w20: U5.2@7075,1275 7125,1225 7225,1225 7225,1325 7275,1325 7325,1375 7325,1625 7375,1675 U19.5@7375,1825
V2: U5.6 U19.11 | length 891.4
  Bottom Layer w20: U5.6@7475,1275 7475,1325 7525,1375 7525,1875 7475,1925 U19.11@7475,2125
V3: U5.7 U17.5 | length 2615.7
  Top Layer w20: v1(6425,1075) 6525,1075 6575,1125 7425,1125 U5.7@7575,1275
  Bottom Layer w20: U17.5@6375,2325 6375,2275 6325,2225 6325,2025 6275,1975 6275,1875 6325,1875 6325,1525 6425,1425 v1(6425,1075)
V4: U6.3 U17.11 U40.5 | length 3857.1
  Top Layer w20: U40.5@4275,875 4325,825 5275,825 5325,875 5825,875 6025,1075 v1(6225,1075) ; U6.3@6175,1825 6225,1875 6375,1875 v1(6425,1925)
  Bottom Layer w20: U6.3@6175,1825 6175,1775 6225,1725 v1(6225,1075) ; v1(6425,1925) 6425,2525 6475,2575 U17.11@6475,2625
V5: U6.2 U17.14 U40.4 | length 3774.3
  Top Layer w20: U40.4@4175,875 4225,925 4775,925 v1(4825,875) ; v1(4825,1825) 5875,1825 5925,1775 6025,1775 U6.2@6075,1825
  Bottom Layer w20: v1(4825,875) v1(4825,1825) ; U6.2@6075,1825 6075,1875 6125,1925 6125,2525 6175,2575 U17.14@6175,2625
V6: U6.6 U12.10 U13.9 U14.9 U19.3 | length 6845
  Top Layer w20: v1(2275,1625) v1(3425,1625) v1(3625,1625) ; v1(3625,1825) 4375,1825 v1(4425,1875) 6125,1875 6125,1775 6425,1775 U6.6@6475,1825 6525,1775 7125,1775 U19.3@7175,1825
  Bottom Layer w20: v1(2275,1625) 2275,2125 2325,2175 U12.10@2325,2275 ; U13.9@3375,1175 3425,1225 v1(3425,1625) ; v1(3625,1625) v1(3625,1825) ; U14.9@4375,2275 4375,2225 4425,2175 v1(4425,1875)
V7: U6.7 U12.9 U19.6 U19.14 | length 6495
  Top Layer w20: v1(2425,2175) 2475,2125 4475,2125 4525,2075 v1(4625,2075) ; v1(4625,1525) 5575,1525 5625,1475 v1(6625,1475) ; U6.7@6575,1825 6625,1875 v1(7225,1875) 7425,1875 U19.6@7475,1825
  Bottom Layer w20: v1(2425,2175) U12.9@2425,2275 ; v1(4625,1525) v1(4625,2075) ; U6.7@6575,1825 6575,1775 6625,1725 v1(6625,1475) ; U19.14@7175,2125 7175,1925 v1(7225,1875)
VCC: R2.1@3725,2375 R2.5 R4_2.1 R5_2.1 R6_2.1 R14.2 R_VCC.1 T2.4 T2.7 T2.11 T2.14 U1.14 U2.1 U2.13 U2.14 U3.1 U3.9 U3.10 U3.11 U3.15 U3.16 U4.1 U4.16 U5.16 U6.16 U7.2 U7.10 U7.16 U8.1 U8.13 U8.14 U9.1 U9.10 U9.14 U10.14 U11.5 U11.10 U11.14 U12.14 U13.14 U14.14 U15.16 U16.16 U17.10 U17.16 U18.16 U19.13 U19.16 U20.11 U21.8 U22.8 U23.8 U24.8 U25.8 U26.8 U27.8 U28.8 U29.1 U29.27 U29.28 U30.16 U31.16 U32.20 U33.16 U34.14 U35.8 U35.14 U36.16 U37.16 U38.16 U39.16 U40.14 U41.1 U41.28 | length 45868.8
  Top Layer w20: U39.16@1275,3325 1425,3175 1525,3175 1575,3125 v1(1875,3125) ; U7.16@1825,670 1874.53,620.47 2375.47,620.47 2480,725 2665,725 v1(2715,675) U35.14@2875,675 2925,725 3425,725 U35.8@3475,675 R4_2.1@3775,675 U11.14@3875,675 3925,725 4225,725 U11.10@4275,675 ; U3.16@1825,1175 U3.15@1925,1175 1975,1125 2275,1125 U3.11@2325,1175 U3.10@2425,1175 U3.9@2525,1175 v1(2723.77,1175) 2726.05,1172.72 2872.72,1172.72 U13.14@2875,1175 ; U1.14@1925,1725 1975,1775 2675,1775 v1(2725,1725) U34.14@2875,1725 ; v1(1925,2625) v1(2325,2625) ; U41.1@2125,4425 U41.28@2725,4425 U29.1@2875,4425 2975,4425 3025,4475 3375,4475 3375,4425 U29.28@3475,4425 ; v1(2725,2275) U8.14@2875,2275 U8.13@2975,2275 ; v1(2725,2775) U10.14@2875,2775 2925,2725 v1(3675,2725) ; R2.5@3625,3425 U20.11@3775,3425 ; v1(3675,2475) v1(4575,2475) ; v1(3775,1175) U40.14@3875,1175 ; v5(3775,1725) U2.14@3875,1725 U2.13@3975,1725 ; v1(4425,525) v1(4775,525) ; v1(4475,2825) 4534.06,2825 4629.53,2729.53 4820.47,2729.53 R6_2.1@4875,2675 ; v1(4775,675) U36.16@4975,675 ; v1(4775,1275) U31.16@4975,1275 ; v1(4775,1475) 4825,1425 v1(5975,1425) ; v1(4775,2025) U30.16@4975,2025 ; v1(5875,1575) U4.16@5975,1575 ; v1(5875,2125) U6.16@5975,2125 ; v1(5875,2625) U17.16@5975,2625 6025,2675 6525,2675 U17.10@6575,2625 ; v1(6225,775) T2.11@6315,775 6525,775 ; T2.14@6315,627.36 v1(6522.64,627.36) 6525,629.73 6525,775 ; 6550,950 6550,775 ; U28.8@6673.81,2775 6723.81,2825 v1(6775,2825) 7225,2825 ; U26.8@6673.81,3225 v1(6775,3225) ; U24.8@6673.81,3675 v1(6775,3675) ; T2.4@6701.69,775 6550,775 ; 6773.95,1572.72 6972.72,1572.72 U5.16@6975,1575 ; v1(6775,2125) U19.16@6975,2125 7025,2075 7225,2075 U19.13@7275,2125 ; v1(6775,2625) U18.16@6975,2625 ; v1(6775,3025) 7125,3025 7125,3053.05 7124.28,3053.77 7124.28,3095.52 7125,3096.23 7125,3125 7200,3125 7226.19,3151.19 ; v1(6775,3575) 7125,3575 7150,3600 ; 6525,775 6550,775
  Top Layer w50: U22.8@6673.81,4125 6675,4123.81 6675,4050 7675,4050 7675,4123.81 U21.8@7673.81,4125 ; 7150,3600 7625,3600 7673.81,3648.81 U23.8@7673.81,3675 ; 7225,2825 7250,2850 7622.62,2850 7673.81,2798.81 U27.8@7673.81,2775 ; 7226.19,3151.19 7673.81,3151.19 U25.8@7673.81,3220
  Top Layer w100: 6550,950 6525,950 6525,1000 v1(6775,1000) 6775,950 6645.21,950
  Bottom Layer w20: v1(1075,3225) 1275,3225 U39.16@1275,3325 1275,3375 1225,3425 1225,3825 1275,3875 U37.16@1275,3925 1275,3975 1225,4025 1225,4075 ; R_VCC.1@1175,4075 1225,4075 ; U38.16@1275,4425 1275,4375 1225,4325 1225,4075 ; U3.16@1825,1175 U3.1@1825,875 U7.16@1825,675 1825,670 1920,575 1920,375 U7.2@1925,370 ; v1(1875,3125) 1925,3075 U9.14@1925,2775 v1(1925,2625) U9.1@1925,2475 U12.14@1925,2275 1925,2075 1975,2025 1975,1825 1925,1775 U1.14@1925,1725 ; v1(2325,2625) U9.10@2325,2775 ; U8.1@2875,1975 U8.14@2875,2275 ; U29.28@3475,4425 U29.27@3475,4325 3575,4225 3575,4025 3625,3975 3625,3911.36 3656.36,3880 3670,3880 3675,3875 3675,3425 ; R2.5@3625,3425 3675,3425 ; v5@3750,1725 v5(3775,1725) U2.14@3875,1725 U2.1@3875,1425 ; R2.1@3750,2350 3675,2425 3675,3425 ; v1(3775,2275) U14.14@3875,2275 ; U11.10@4275,675 U11.5@4275,375 v1(4425,525) ; v1(4475,2825) 4475,2725 4625,2575 4625,2525 v1(4575,2475) ; 4675,3175 4775,3275 U32.20@4775,3425 4775,3625 ; v1(4775,525) v1(4775,675) v1(4775,1275) v1(4775,1475) v1(4775,2025) ; R5_2.1@4875,2775 U33.16@4975,2775 ; 4900,4350 U16.16@4975,4425 ; U15.16@4970,3925 U15.16@4975,3925 ; v1(5875,1575) v1(5875,2125) v1(5875,2625) ; U4.1@5975,1275 5975,1375 ; U4.16@5975,1575 v1(5975,1425) 5975,1375 ; v1(6225,775) 6025,975 6025,1325 5975,1375 ; v1(6522.64,627.36) 6575,575 R14.2@6575,525 ; U17.10@6575,2625 6673.81,2723.81 U28.8@6673.81,2775
  Bottom Layer w50: v1(6775,2825) v1@6777.5,2827.5 ; U27.8@7673.81,2775 7750,2775 7750,3225 ; U25.8@7673.81,3220 7745,3220 7750,3225 ; U23.8@7673.81,3675 7750,3675 ; U21.8@7673.81,4125 7750,4125 7750,3675 ; 7750,3225 7750,3675
  Bottom Layer w70: U41.28@2725,4425 2730.4,4425 2800,4355.4 2800,3075 2750,3025 2750,2775 2750,1175 2750,675 ; R4_2.1@3750,700 3750,1725 R2.1@3750,2350 ; 4675,3175 4675,2900 4775,2800 4800,2775 4800,2050 4780,2030 v1@4780,2025 ; 4775,3625 4900,3750 4900,3925 ; 4850,2175 R5_2.1@4850,2800 ; 4900,4350 4900,3925 ; U15.16@4970,3925 4900,3925 ; v1(6775,1000) 6775,1039.85 6757.42,1057.42 6757.42,1319.85 6762.58,1325 6762.58,2312.58 6800,2350 6800,2825 6800,2850 6801.05,2851.05 6801.05,3498.95 6800,3500 6800,3675 6800,4050 v4(6775,4075)
  Bottom Layer w100: 4775,2800 4850,2800 R5_2.1@4875,2775
W\A\I\T\: U9.5 U20.24 | length 2841.4
  Top Layer w20: v1(2375,3025) 3525,3025 3575,3075 v1(3975,3075) ; v1(4125,2825) U20.24@4375,2825
  Bottom Layer w20: U9.5@2325,2475 2325,2525 2375,2575 v1(2375,3025) ; v1(3975,3075) 3975,2825 v1(4125,2825)
W\E\: U9.8 U21.3 U22.3 U23.3 U24.3 U25.3 U26.3 U27.3 U28.3 | length 8227
  Top Layer w20: v1(2525,2625) 3675,2625 3725,2675 4450,2675 4550,2575 5625,2575 5725,2675 5975,2675 5975,2675.2 6022.24,2722.44 6122.44,2722.44 6173.81,2773.81 U28.3@6173.81,2775 ; U22.3@6173.81,4125 6173.81,4173.81 6285,4285 6291.57,4285 6315,4308.43 6315,4315 6325,4325 v1(7175,4325)
  Bottom Layer w20: v1(2525,2625) U9.8@2525,2775 ; U28.3@6173.81,2775 6173.81,2823.81 6225,2875 6225,3053.77 6224.28,3054.49 6224.28,3096.23 6225,3096.95 6225,3125 6173.81,3176.19 U26.3@6173.81,3225 6173.81,3273.81 6225,3325 6225,3503.77 6224.28,3504.49 6224.28,3546.23 6225,3546.95 6225,3575 6173.81,3626.19 U24.3@6173.81,3675 6173.81,3723.81 6225,3775 6225,3958.77 6224.28,3959.49 6224.28,4001.23 6225,4001.95 6225,4025 6173.81,4076.19 U22.3@6173.81,4125 ; U27.3@7173.81,2775 7173.81,2823.81 7180,2830 7193.64,2830 7225,2861.36 7225,3053.05 7224.28,3053.77 7224.28,3095.52 7225,3096.23 7225,3125 7173.81,3176.19 7173.81,3220 7175,3221.19 7175,3268.93 7225,3318.93 7225,3498.05 7224.28,3498.77 7224.28,3540.52 7225,3541.23 7225,3575 7175,3625 7175,3673.81 U23.3@7173.81,3675 7173.81,3723.81 7225,3775 7225,3953.05 7224.28,3953.77 7224.28,4025.72 7173.81,4076.19 U21.3@7173.81,4125 7175,4126.19 v1(7175,4325)
W\R\: U14.12 U20.22 | length 650
  Top Layer w20: v1(4075,2625) U20.22@4375,2625
  Bottom Layer w20: U14.12@4075,2275 v1(4075,2625)
W\R\B\U\F\: U9.4 U13.12 U34.4 | length 2203.6
  Top Layer w20: v1(2225,2375) v1(2875,2375) ; v1(3025,1475) 3125,1475 U34.4@3175,1425
  Bottom Layer w20: v1(2225,2375) U9.4@2225,2475 ; v1(2875,2375) 2925,2325 2925,1625 3025,1525 v1(3025,1475) 3025,1375 3075,1325 U13.12@3075,1175
WRBUF: U13.3 U32.11 U34.3 | length 5303.6
  Top Layer w20: v1(3125,2325) v1(5675,2325)
  Bottom Layer w20: U13.3@3075,875 3075,925 3125,975 3125,1325 3075,1375 U34.3@3075,1425 3075,1525 3025,1575 3025,2325 v1(3125,2325) ; v1(5675,2325) 5725,2375 5725,3325 5675,3375 U32.11@5675,3425
pads on no net: SV1.7 SV1.8 T2.1 T2.8 U1.10 U1.11 U2.4 U2.8 U2.10 U3.4 U3.13 U4.4 U4.13 U5.4 U5.13 U6.4 U6.12 U6.13 U7.3 U7.4 U7.5 U7.12 U7.13 U7.14 U8.4 U8.10 U9.6 U9.9 U20.18 U20.23 U21.1 U22.1 U23.1 U24.1 U25.1 U26.1 U27.1 U28.1 U29.26 U33.7 U33.10 U34.8 U34.9 U34.12 U34.13 U35.2 U35.3 U35.4 U35.5 U35.11 U35.12 U35.13 U38.5 U38.6 U38.10 U38.13 U38.14 U39.1 U39.14 U39.15 U41.26

## Keep-outs
Keep-Out Layer:
  the board outline again, w10